# Altium PCB FOC_ESC V1.1.1_with_component_silkscreen.PcbDoc
Units mil, origin at the board's own origin, x right, y up, seen from the top; angles counter-clockwise.
Board outline 1771.65 x 787.4 mil, 4 copper layers (Top Layer, Mid-Layer 2, Mid-Layer 3, Bottom Layer); 83 components, 57 nets, 248 pads, 542 vias.
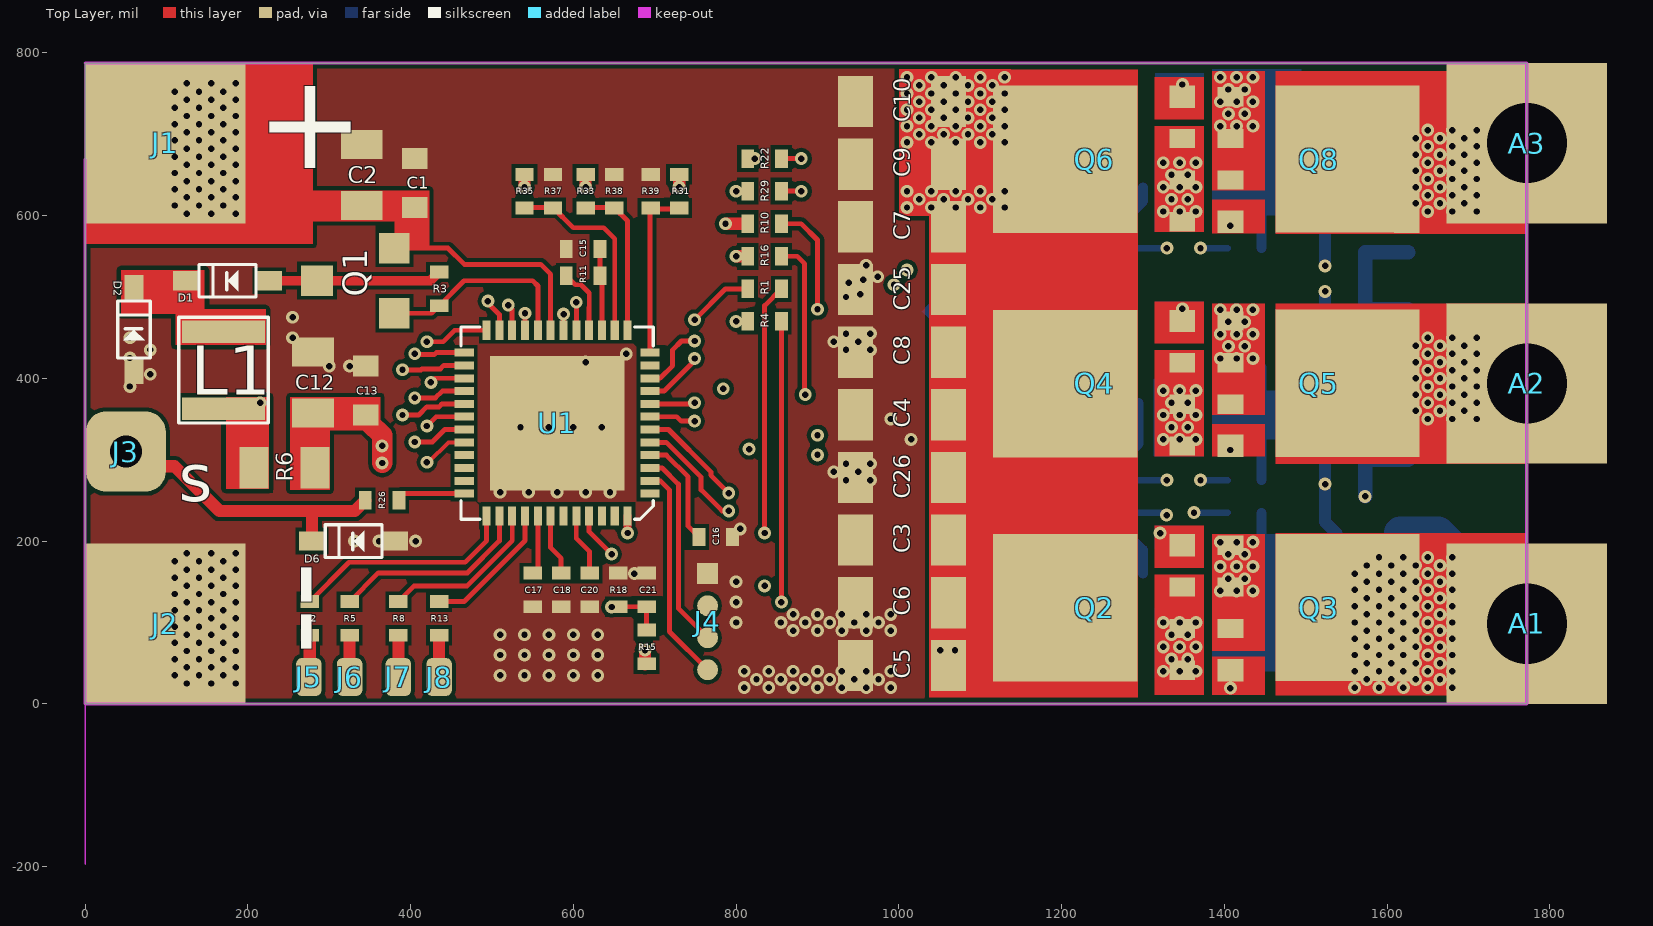
[diagram p0: Top Layer view]
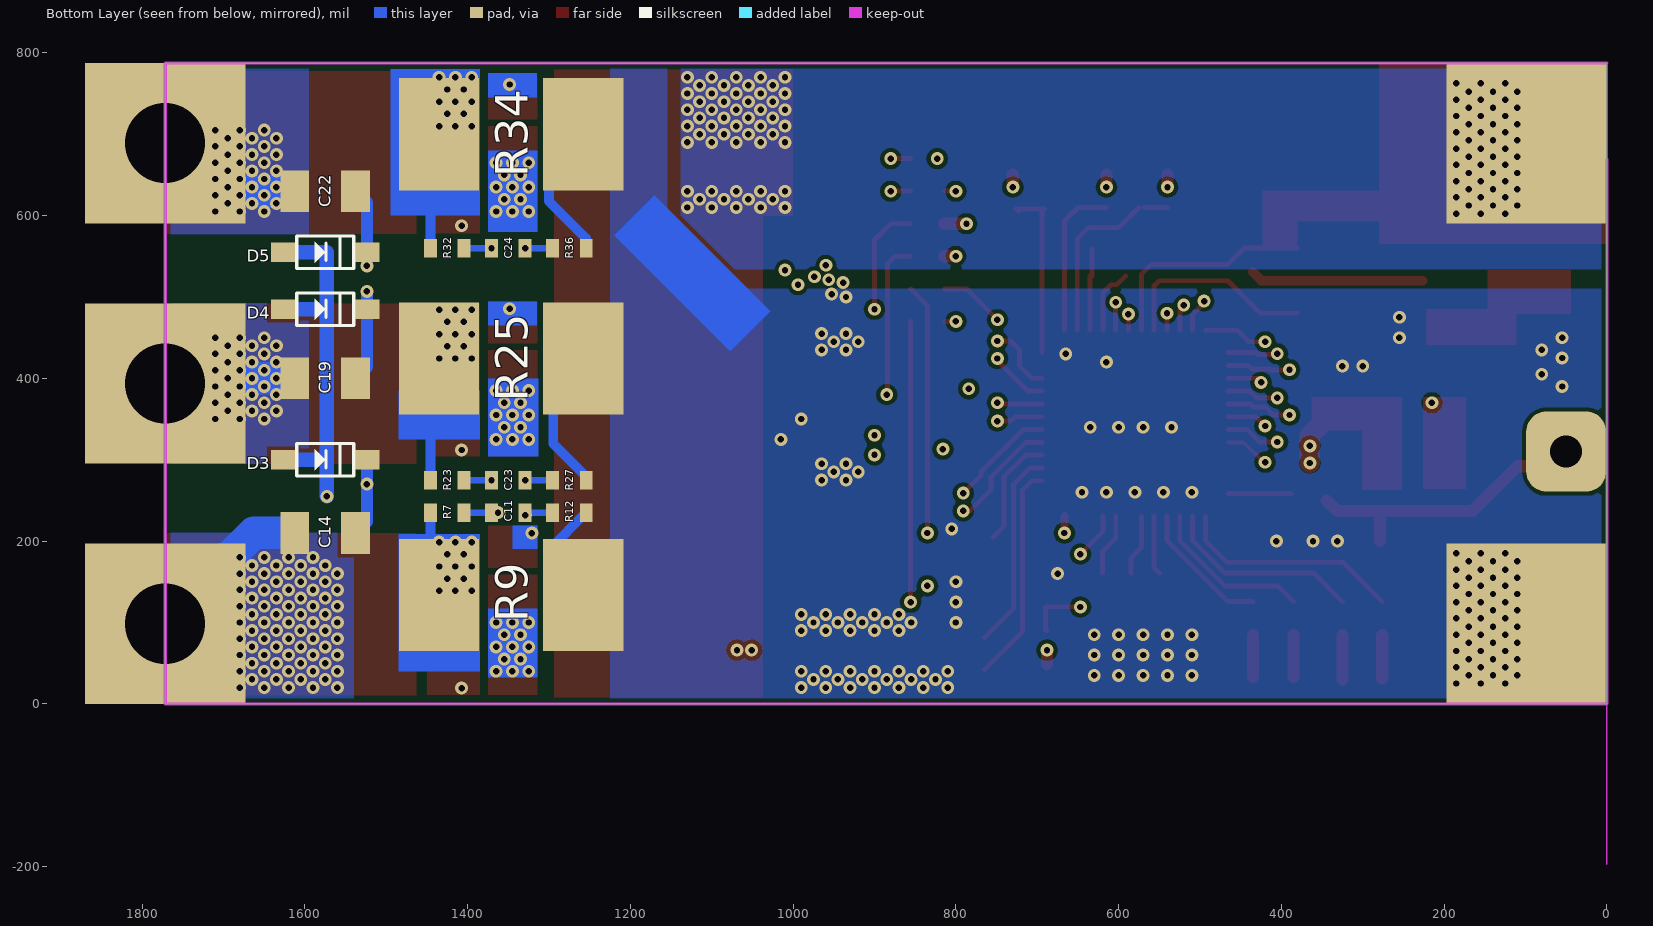
[diagram p1: Bottom Layer view, seen from below]
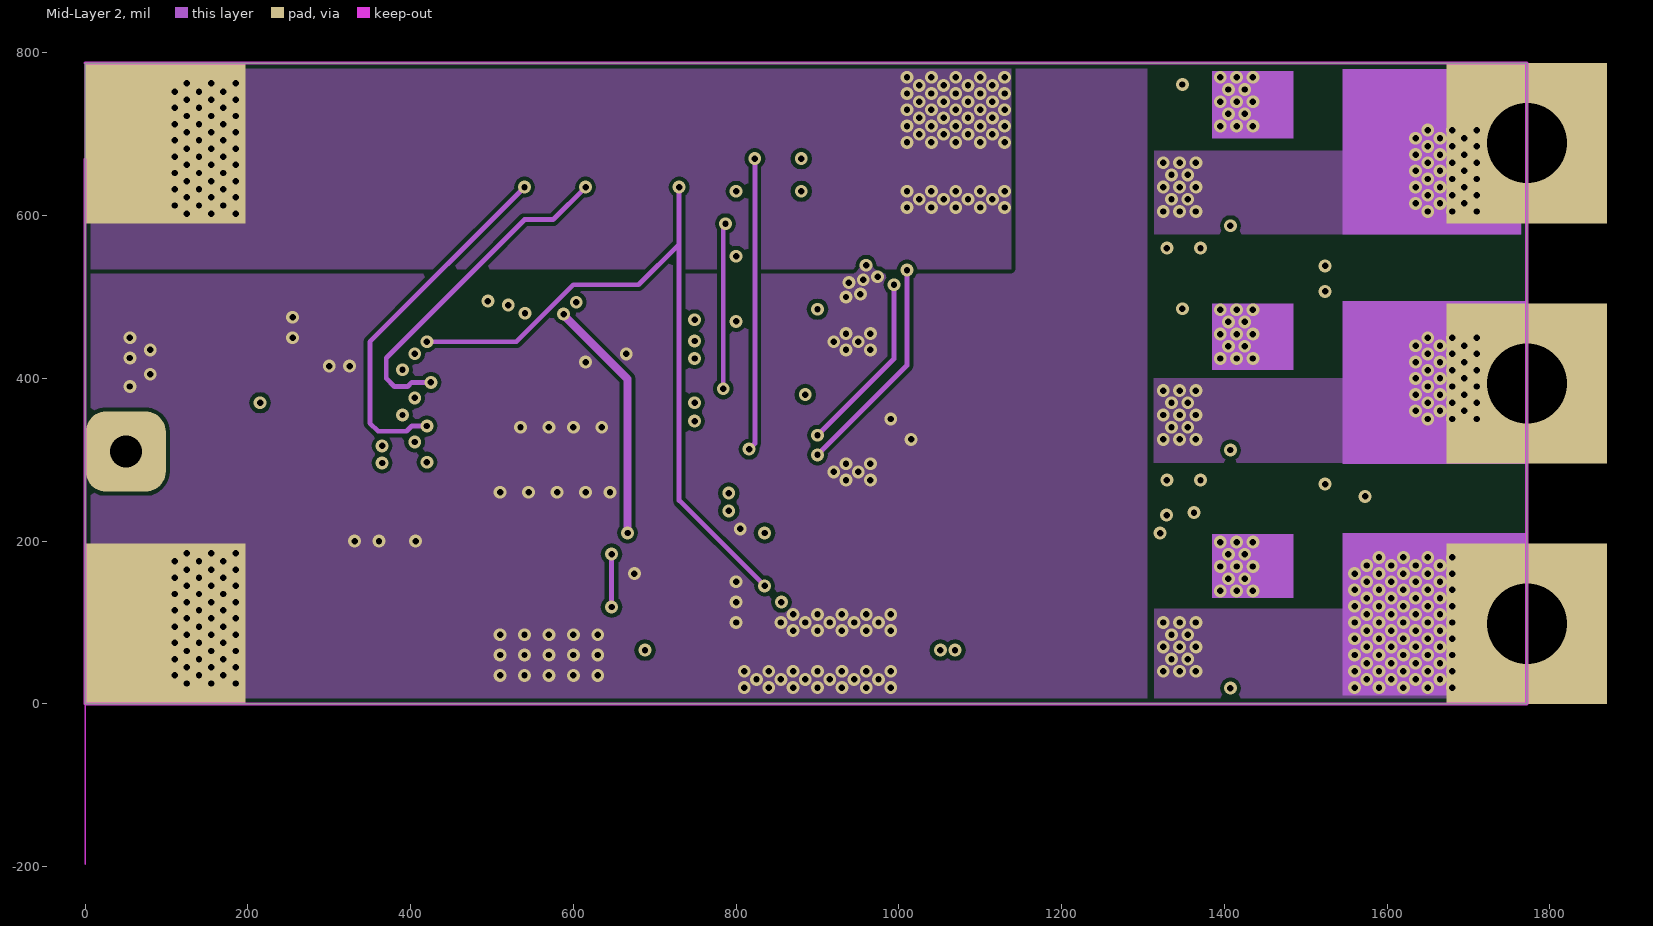
[diagram p2: Mid-Layer 2]
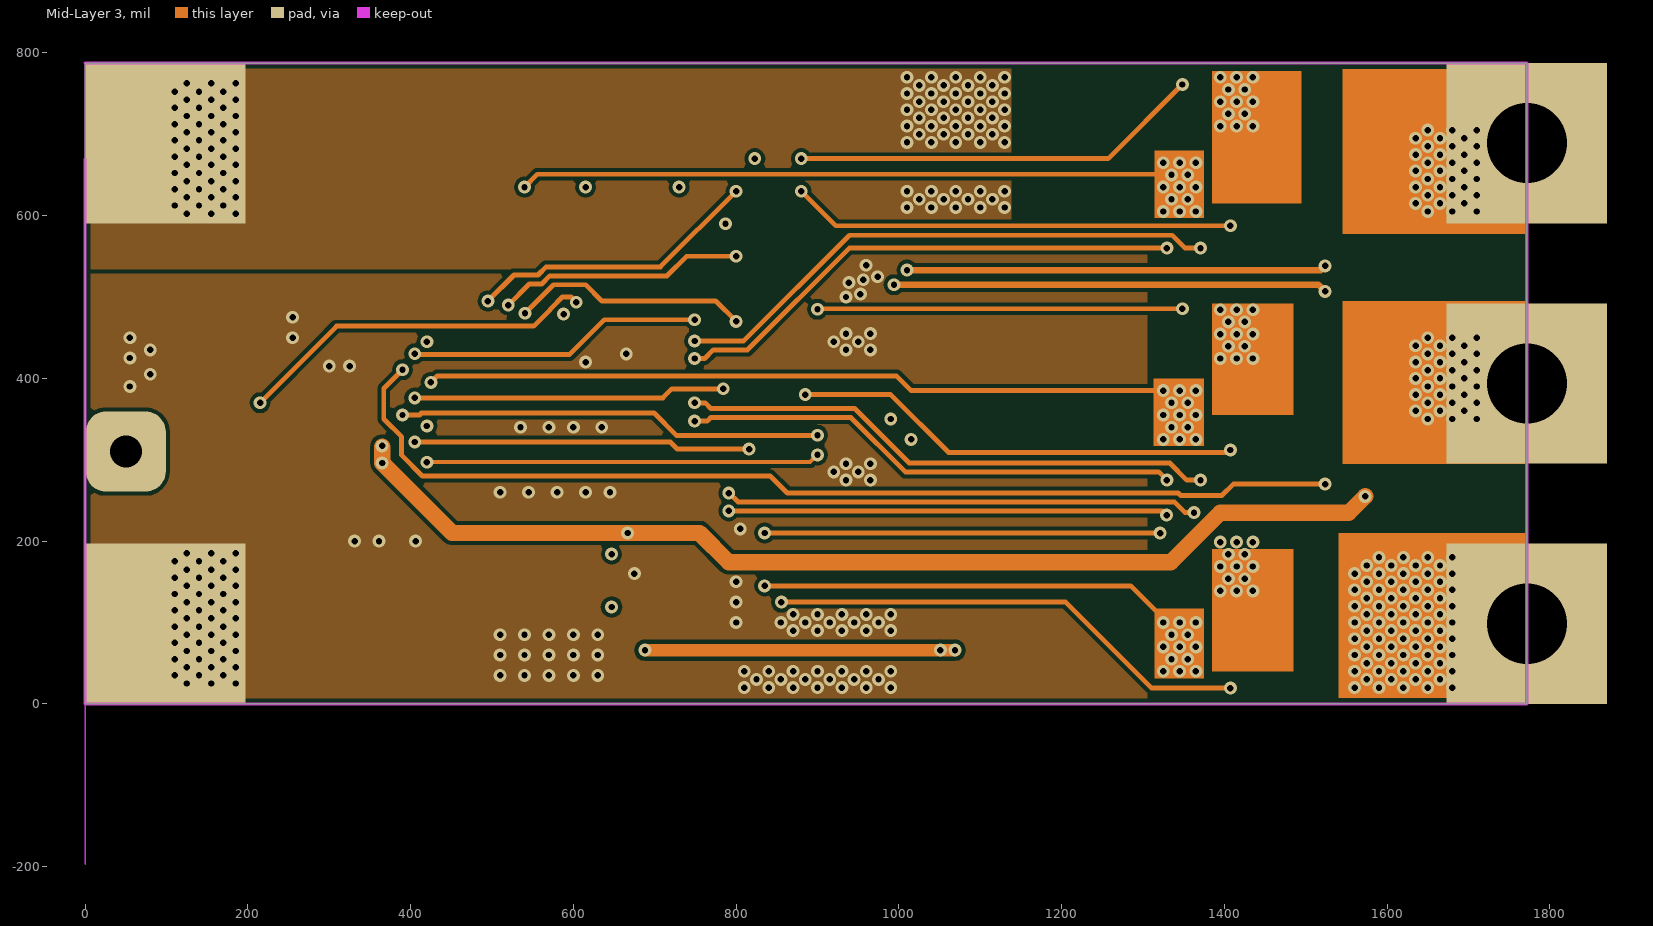
[diagram p3: Mid-Layer 3]

## Layer stack, top to bottom
Top Solder: solder mask 0.4, Solder Resist, Dk 3.5
Top Layer: signal copper 1.4
Dielectric1: core 12.6, FR-4, Dk 4.8
Mid-Layer 2: signal copper 1.4
Dielectric2: prepreg 12.6, FR-4, Dk 4.8
Mid-Layer 3: signal copper 1.4
Dielectric3: core 12.6, FR-4, Dk 4.8
Bottom Layer: signal copper 1.4
Bottom Solder: solder mask 0.4, Solder Resist, Dk 3.5

## Board outline
0,0 1771.65,0 1771.65,787.4 0,787.4

## Design rules (kind name [scope] priority, off if disabled: settings)
Clearance [All] p1: gap=5 ignorepadtopadclearanceinfootprint=FALSE except(0: Arc-Hole Track-Hole SMDPad-Hole THPad-Hole Via-Hole Fill-Hole Poly-Hole Region-Hole Text-Hole)
PlaneConnect [All] p1: planeconnectstyle=Direct reliefexpansion=20 reliefentries=4 reliefconductorwidth=10 reliefairgap=10
PolygonConnect [All] p1: connectstyle=Direct reliefconductorwidth=10 reliefentries=4 polygonreliefangle="90 Angle" airgapwidth=10
RoutingVias [All] p1: holewidth=28 width=50 viastyle="Through Hole" minholewidth=28 minwidth=50 maxholewidth=28 maxwidth=50
SilkToSolderMaskClearance SilkscreenOverComponentPads [IsPad] p1: minsilkscreentomaskgap=10 clearancetoexposedcopper=TRUE
SolderMaskExpansion [All] p1: expansion=0
Width [All] p1: maxlimit=50 minlimit=5 preferedwidth=8
28 further rules are at their usual default settings.

## Components (designator, comment, footprint, x,y, rotation, side; value= is the part's Value field where it differs from the comment)
A1 "" "PAD-1  4*3"#1 1771.65,98.43 r90 top
A2 "" "PAD-1  4*3"#1 1771.65,393.7 r90 top
A3 "" "PAD-1  4*3"#1 1771.65,688.98 r90 top
C1 "0.1uF/25V" 0603-RES 405,640 r90 top
C2 "2.2uF/50V" 0805-RES 340,650 r90 top
C3 "22uF/35V" 1206-RES 1003.94,201.22 r90 top
C4 "22uF/35V" 1206-RES 1003.94,355.21 r90 top
C5 "22uF/35V" 1206-RES 1003.94,47.24 r90 top
C6 "22uF/35V" 1206-RES 1003.94,124.23 r90 top
C7 "22uF/35V" 1206-RES 1003.94,586.18 r90 top
C8 "22uF/35V" 1206-RES 1003.94,432.2 r90 top
C9 "22uF/35V" 1206-RES 1003.94,663.17 r90 top
C10 "22uF/35V" 1206-RES 1003.94,740.16 r90 top
C11 "332" 0402-RES 1350,235 r180 bottom
C12 "10uF/25V" 0805-RES 280,395 r90 top
C13 "0.1uF/25V" 0603-RES 345,385 r90 top
C14 "1uF/25V" 0805-RES 1575,210 r0 bottom
C15 "4.7uF/6.3V" 0402-RES 612,559 r0 top
C16 "2.2uF/6.3V" 0402-RES 775,205 r180 top
C17 "2.2uF/6.3V" 0402-RES 550,140 r90 top
C18 "2.2uF/6.3V" 0402-RES 585,140 r90 top
C19 "1uF/25V" 0805-RES 1575,400 r0 bottom
C20 "4.7uF/6.3V" 0402-RES 620,140 r90 top
C21 "0.1uF/25V" 0402-RES 690,140 r90 top
C22 "1uF/25V" 0805-RES 1575,630 r0 bottom
C23 "332" 0402-RES 1350,275 r180 bottom
C24 "332" 0402-RES 1350,560 r180 bottom
C25 "22uF/35V" 1206-RES 1003.94,509.19 r90 top
C26 "22uF/35V" 1206-RES 1003.94,278.21 r90 top
D1 "T4" SOD323 175,520 r0 top
D2 "T4" SOD323 60,460 r270 top
D3 "T4" SOD323 1575,300 r0 bottom
D4 "T4" SOD323 1575,485 r0 bottom
D5 "T4" SOD323 1575,555 r0 bottom
D6 "3V3 TVS" SOD323 330,200 r0 top
J1 "BAT" "PAD-1  4*3"#2 98.43,688.98 r90 top
J2 "GND" "PAD-1  4*3"#2 98.43,98.43 r90 top
J3 "RC_IN" "PAD-1  2*1.5" 50,310 r180 top
J4 "SWD" 1.0-4p 765,160 r0 top
J5 "PAD" "PAD-1  0.8*1.2" 275,33 r270 top
J6 "PAD" "PAD-1  0.8*1.2" 325,33 r270 top
J7 "PAD" "PAD-1  0.8*1.2" 385,33 r90 top
J8 "PAD" "PAD-1  0.8*1.2" 435,33 r90 top
L1 "LCF1008-150K-T" LCF1008-RES 170,410 r90 top
Q1 "SI2308" SOT-23 380,480 r90 top
Q2 "NTMFS5C430NL" DFN5*6 1240.16,118.11 r90 top
Q3 "NTMFS5C430NL" DFN5*6 1515.75,118.11 r270 top
Q4 "NTMFS5C430NL" DFN5*6 1240.16,393.7 r90 top
Q5 "NTMFS5C430NL" DFN5*6 1515.75,393.7 r270 top
Q6 "NTMFS5C430NL" DFN5*6 1240.16,669.29 r90 top
Q8 "NTMFS5C430NL" DFN5*6 1515.75,669.29 r270 top
R1 "10R" 0402-RES 835,510 r0 top
R2 "100R" 0402-RES 276,105 r270 top
R3 "1K" 0402-RES 435,510 r90 top
R4 "10R" 0402-RES 835,470 r0 top
R5 "100R" 0402-RES 325,105 r270 top
R6 "0.33R" 0805-RES 245,290 r180 top
R7 "100R 1%" 0402-RES 1425,235 r0 bottom
R8 "100R" 0402-RES 385,105 r270 top
R9 "0.001R" 2512-RES 1346.46,133.7 r180 bottom
R10 "10R" 0402-RES 835,590 r0 top
R11 "51R" 0402-RES 612,526 r180 top
R12 "100R 1%" 0402-RES 1275,235 r180 bottom
R13 "100R" 0402-RES 435,105 r270 top
R15 "47K" 0402-RES 690,70 r270 top
R16 "10R" 0402-RES 835,550 r0 top
R18 "2K" 0402-RES 655,140 r270 top
R22 "10R" 0402-RES 835,670 r0 top
R23 "100R 1%" 0402-RES 1425,275 r0 bottom
R25 "0.001R" 2512-RES 1346.46,424.29 r180 bottom
R26 "1K" 0402-RES 365,250 r180 top
R27 "100R 1%" 0402-RES 1275,275 r180 bottom
R29 "10R" 0402-RES 835,630 r0 top
R31 "47K" 0402-RES 730,630 r90 top
R32 "100R 1%" 0402-RES 1425,560 r0 bottom
R33 "47K" 0402-RES 615,630 r90 top
R34 "0.001R" 2512-RES 1346.46,700 r180 bottom
R35 "47K" 0402-RES 540,630 r90 top
R36 "100R 1%" 0402-RES 1275,560 r180 bottom
R37 "2K" 0402-RES 575,630 r270 top
R38 "2K" 0402-RES 650,630 r270 top
R39 "2K" 0402-RES 695,630 r270 top
U1 "PCA5523" QFN48 580,345 r180 top

## Footprints (in the part's own frame and the unit in brackets; to place one, negate y for a bottom-side part, rotate by r counter-clockwise, add the part's x,y. Pads: shape width x height; smd on the part's side, far side on the other; paste and mask are expansions set on the pad)
1.0-4p [mm]
  rect 0.65x0.65 smd: 1(0,0)
  round 0.65 smd: 2(0,-1) 3(0,-2) 4(0,-3)
0402-RES [mm]
  rect 0.4x0.575 smd: 1(-0.525,0) 2(0.525,0)
0603-RES [mm]
  rect 0.65x0.8 smd: 1(-0.762,0) 2(0.762,0)
0805-RES [mm]
  rect 0.9x1.3 smd: 1(-0.95,0) 2(0.95,0)
1206-RES [mm]
  rect 1.6x1.1 smd: 1(0,-1.45) 2(0,1.45)
2512-RES [mm]
  rect 2.5x3.5 smd mask+0: 1(-2.25,0) 2(2.25,0)
DFN5*6 [mm]
  rect 0.6x0.8 smd: 3(-1.95,-2.75) 3(-0.65,-2.75) 3(0.65,-2.75)
  rect 0.7x0.8 smd: 4(1.95,-2.75) 5(-1.95,2.75) 5(-0.65,2.75) 5(0.65,2.75) 5(1.95,2.75)
  rect 4.6x4.5 smd mask+0: 5(-0.006,0.908)
LCF1008-RES [mm]
  rect 0.7x2.6 smd: 1(-1.2,0) 2(1.2,0)
  silkscreen extent -1.65,-1.4 1.65,1.4
"PAD-1  0.8*1.2" [mm]
  rrect50% 1.2x0.8 smd: 1(0,0)
"PAD-1  2*1.5" [mm]
  rrect50% 2.5x2.5 hole 1: 1(0,0)
"PAD-1  4*3"#1 [mm]
  rect 5x5 hole 2.5: 1(0,0)
"PAD-1  4*3"#2 [mm]
  rect 5x5 all layers, no hole: 1(0,0)
QFN48 [mm]
  rect 4.2x4.2 smd: 0(0,0)
  rect 0.6x0.25 smd: 1(-2.9,2.2) 2(-2.9,1.8) 3(-2.9,1.4) 4(-2.9,1) 5(-2.9,0.6) 6(-2.9,0.2) 7(-2.9,-0.2) 8(-2.9,-0.6) 9(-2.9,-1) 10(-2.9,-1.4) 11(-2.9,-1.8) 12(-2.9,-2.2) 25(2.9,-2.2) 26(2.9,-1.8) 27(2.9,-1.4) 28(2.9,-1) 29(2.9,-0.6) 30(2.9,-0.2) 31(2.9,0.2) 32(2.9,0.6) 33(2.9,1) 34(2.9,1.4) 35(2.9,1.8) 36(2.9,2.2)
  rect 0.25x0.6 smd: 13(-2.2,-2.9) 14(-1.8,-2.9) 15(-1.4,-2.9) 16(-1,-2.9) 17(-0.6,-2.9) 18(-2.2,2.9) 18(-0.2,-2.9) 19(0.2,-2.9) 20(0.6,-2.9) 21(1,-2.9) 22(1.4,-2.9) 23(1.8,-2.9) 24(2.2,-2.9) 37(2.2,2.9) 38(1.8,2.9) 39(1.4,2.9) 40(1,2.9) 41(0.6,2.9) 42(0.2,2.9) 43(-0.2,2.9) 44(-0.6,2.9) 45(-1,2.9) 46(-1.4,2.9) 47(-1.8,2.9)
  silkscreen extent -3,-3 3,3
SOD323 [mm]
  rect 0.8x0.6 smd paste+0 mask+0: 1(1.3,0) 2(-1.3,0)
  silkscreen extent -0.89,-0.51 0.89,0.51
SOT-23 [mm]
  rect 0.95x0.95 smd: 1(0,0) 2(2.032,0)
  rect 0.95x1 smd: 3(1.016,2.413)

## Part data
A1 A2 A3 J1 J2 J3: library part PAD
C1 C2 C11 C12 C13 C14 C15 C16 C17 C18 C19 C20 C21 C22 C23 C24: library part Cap
C3 C4 C5 C6 C7 C8 C9 C10 C25 C26: library part C
D1 D2 D3 D4 D5 D6: library part Diode
J4: library part J_4P
L1 R1 R2 R3 R4 R5 R6 R7 R8 R9 R10 R11 R12 R13 R15 R16 R18 R22 R23 R25 R26 R27 R29 R31 R32 R33 R34 R35 R36 R37 R38 R39: library part R
Q1: library part P-MOS
Q2 Q3 Q4 Q5 Q6 Q8: library part AON7418

## Via types
v1: diameter 15.75, hole 7.87, Top Layer to Bottom Layer, tented both sides, 542 vias

## Nets (pads, with @x,y where several pads share a name; then routed paths per layer and width w, separated by ;. In a path a pad name is that pad's centre, name@x,y a point inside that pad or via, vN(x,y) a via of type N, cw(c..) or ccw(c..) an arc to the next point about the centre after c; other vN are vias at no path point)
+3V3: J4.2
A_DRV_HI: R1.1 U1.25 | length 516.5
  Top Layer w6: v1(405,430.25) 406.12,429.13 429.13,429.13 431.61,431.61 U1.25 ; v1(749,472) 787,510 R1.1 805,510
  Mid-Layer 3 w6: v1(405,430.25) 406.12,429.13 595.05,429.13 637.92,472 v1(749,472)
  Bottom Layer w6: v1(405,430.25) v1@406.12,429.13
A_DRV_LO: R4.1 U1.21 | length 327.7
  Top Layer w6: U1.21 v1(540.63,480) ; v1(800,470) R4.1
  Mid-Layer 3 w6: v1(540.63,480) 575.63,515 615.12,515 635.12,495 775,495 v1(800,470)
B_DRV_HI: R10.1 U1.28 | length 679.4
  Top Layer w6: v1(405,376) 430.44,376 438.81,384.37 U1.28
  Top Layer w15: v1(787,590) R10.1
  Mid-Layer 2 w6: v1(784.13,387.13) 784.13,587.13 v1(787,590)
  Mid-Layer 3 w6: v1(405,376) 710,376 721,387 v1@784.13,387
B_DRV_LO: R16.1 U1.22 | length 345.3
  Top Layer w6: v1@524.76,485.24 524.76,459.3 U1.22
  Top Layer w15: v1(800,550) R16.1
  Mid-Layer 3 w6: v1(520,490) 546,516 561.07,516 571.07,526 715.13,526 739.13,550 v1(800,550)
BAT_IN: C21.1 R15.1 R18.2 U1.45 | length 186.9
  Top Layer w6: U1.45 619.37,211.63 v1(647,184) ; R18.2 C21.1 R15.1
  Mid-Layer 2 w6: v1(647,119) v1(647,184)
C_DRV_HI: R22.1 U1.31 | length 841.7
  Top Layer w6: v1(405,321.75) 426.75,321.75 442.13,337.13 U1.31
  Mid-Layer 2 w6: v1(816,313) 823,320 v1(823,670)
  Mid-Layer 3 w6: v1(405,321.75) 719.25,321.75 728,313 v1(816,313)
C_DRV_LO: R29.1 U1.23 | length 414.5
  Top Layer w6: v1@495,492.55 509.13,478.42 U1.23 ; v1(800,630) R29.1
  Mid-Layer 3 w6: v1(495,495) 527,527 556.52,527 566.52,537 707,537 v1(800,630)
GND: C1.2 C2.2 C3.2 C4.2 C5.2 C6.2 C7.2 C8.2 C9.2 C10.2 C12.2 C13.2 C15.1 C16.1 C17.1 C18.1 C20.1 C21.2 C25.2 C26.2 D2.1 D6.1 J2.1 J4.1 R9.2 R12.2 R18.1 R25.2 R27.2 R34.2 R36.2 R37.1 R38.1 R39.1 U1.0 | length 314.7
  Bottom Layer w11.81: R9.2@1254.33,137.24 R9.2 ; R12.2 1300,189.33 R9.2@1300,160 ; R27.2 1254.33,279.33 1295,320 R25.2@1295,370 ; R25.2@1254.33,420.75 R25.2 ; R36.2 1254.33,571.85 1300,617.52 R34.2@1300,635 ; R34.2@1254.33,696.46 R34.2
  other v1: 810,20 840,20 870,20 900,20 930,20 960,20 990,20 125,25 155,25 185,25 825,30 855,30 885,30 915,30 945,30 975,30 110,35 140,35 170,35 510,35 540,35 570,35 600,35 630,35 810,40 840,40 870,40 900,40 930,40 960,40 990,40 125,45 155,45 185,45 110,55 140,55 170,55 510,60 540,60 570,60 600,60 630,60 125,65 155,65 185,65 110,75 140,75 170,75 125,85 155,85 185,85 510,85 540,85 570,85 600,85 630,85 870,90 900,90 930,90 960,90 990,90 110,95 140,95 170,95 800,100 855,100 885,100 915,100 945,100 975,100 125,105 155,105 185,105 870,110 900,110 930,110 960,110 990,110 110,115 140,115 170,115 125,125 155,125 185,125 800,125 110,135 140,135 170,135 125,145 155,145 185,145 800,150 110,155 140,155 170,155 675,160 125,165 155,165 185,165 110,175 140,175 170,175 125,185 155,185 185,185 331.18,200 361.18,200 406.18,200 805,215 510,260 545,260 580,260 615,260 645,260 935,275 965,275 920,285 950,285 935,295 965,295 1015,325 535,340 570,340 600,340 635,340 990,350 55,390 80,405 300,415 325,415 615,420 55,425 665,430 80,435 935,435 965,435 920,445 950,445 55,450 255,450 935,455 965,455 255,475 935,500 952.68,503.54 938.54,517.68 956.21,521.21 973.89,524.75 959.75,538.89
IA_A: C11.1 R7.1 U1.6 | length 744.9
  Top Layer w6: U1.6 715,337.13 ; 716.87,337.13 769,285 769,281 v1(791,259)
  Mid-Layer 3 w6: v1(791,259) 791.45,259 802.32,248.13 1338.65,248.13 1351.78,235 v1(1362.67,235)
  Bottom Layer w8: C11.1 R7.1
IA_B: C11.2 R12.1 U1.5 | length 717.8
  Top Layer w6: U1.5 714.18,321.38 757,278.56 757,263 782.87,237.13 v1(790.87,237.13)
  Mid-Layer 3 w6: v1(790.87,237.13) 1323.87,237.13 v1(1329,232)
  Bottom Layer w8: R12.1 C11.2 1329,234.67 v1(1329,232)
IB_A: C23.1 R23.1 U1.8 | length 750
  Top Layer w6: U1.8 747.68,368.62 v1(749,369.94)
  Mid-Layer 3 w6: v1(749,369.94) 762.06,369.94 769.06,362.94 945.62,362.94 1012.56,296 1333,296 1354,275 v1(1370.67,275)
  Bottom Layer w8: v1(1370.67,275) R23.1
IB_B: C23.2 R27.1 U1.7 | length 704.8
  Top Layer w6: U1.7 727.13,352.87 732.54,347.46 v1(749,347.46)
  Mid-Layer 3 w6: v1(749,347.46) 764.52,347.46 769,351.94 941.06,351.94 1008,285 1319.33,285 v1(1329.33,275)
  Bottom Layer w8: R27.1 v1(1329.33,275)
IC_A: C24.1 R32.1 U1.10 | length 800.9
  Top Layer w6: U1.10 706.47,400.12 722,415.65 722,435 732.9,445.9 v1(749,445.9)
  Mid-Layer 3 w6: v1(749,445.9) 749.1,446 809.44,446 939.32,575.87 1335.91,575.87 1351.78,560 v1(1370.67,560)
  Bottom Layer w8: v1(1370.67,560) R32.1
IC_B: C24.2 R36.1 U1.9 | length 743
  Top Layer w6: U1.9 711.37,384.37 749,422 v1(749,424.42)
  Mid-Layer 3 w6: v1(749,424.42) 761.42,424.42 772,435 814,435 939,560 v1(1329.33,560)
  Bottom Layer w8: R36.1 v1(1329.33,560)
NetC14_1: C14.1 D3.2 U1.26 | length 1459
  Top Layer w6: v1(390,410.5) 412.7,410.5 413.82,411.62 436.62,411.62 440.87,415.87 U1.26
  Mid-Layer 3 w6: v1@390.37,410.87 v1(390,410.5) 367,387.5 367,350 389,328 389,305.55 414.55,280 842,280 862.87,259.13 1343.21,259.13 1346.34,256 1397,256 1411,270 v1(1523.82,270)
  Bottom Layer w15: D3.2 v1(1523.82,270) 1523.82,223.78 C14.1
NetC15_2: C15.2 R11.1 U1.15 | length 99.8
  Top Layer w6: R11.1 C15.2 ; U1.15 R11.1@635.12,526
NetC16_2: C16.2 U1.4 | length 137.4
  Top Layer w6: U1.4 714.37,305.63 741,279 741,233.67 741,218.33 C16.2
NetC17_2: C17.2 U1.41 | length 127.2
  Top Layer w6: C17.2 556.38,167.05 U1.41 556.38,176.38
NetC18_2: C18.2 U1.42 | length 75.5
  Top Layer w6: U1.42 572.13,191.87 585,179 C18.2
NetC19_1: C19.1 D4.2 U1.29 | length 1473.5
  Top Layer w6: v1(390,355) 410,355 420,365 435,365 438.62,368.62 U1.29
  Mid-Layer 2 w6: v1(900,330) 994,424 v1(994,515)
  Mid-Layer 3 w6: v1(390,355) 411.05,355 413.42,357.37 699.18,357.37 726.56,330 v1(900,330)
  Mid-Layer 3 w8: v1(994,515) 1515.64,515 v1(1523.82,506.82)
  Bottom Layer w15: v1(1523.82,506.82) D4.2 1523.82,413.78 C19.1
NetC20_2: C20.2 U1.44 | length 76.9
  Top Layer w6: U1.44 603.62,203.38 620,187 C20.2
NetC22_1: C22.1 D5.2 U1.32 | length 1418.4
  Top Layer w5: v1(420,297) 422,297 446.38,321.38 U1.32
  Mid-Layer 2 w6: v1(900,306) 1010,416 v1(1010,533)
  Mid-Layer 3 w5: v1(420,297) 891,297 v1(900,306)
  Mid-Layer 3 w8: v1(1010,533) v1@1518.64,533
  Bottom Layer w15: v1(1523.82,538.18) D5.2 1523.82,616.22 C22.1
NetD1_1: D1.1 Q1.3 R3.2 | length 213.2
  Top Layer w12: D1.1 Q1.3 424.33,520 R3.2
NetD1_2: D1.2 D2.2 L1.2
NetD6_2: D6.2 J3.1 R26.2 | length 367.4
  Top Layer w6: J3.1 J3.1@68,292
  Top Layer w15: J3.1@68,292 110,292 165,237 277.64,237 ; D6.2 278.82,235.82 277.64,237 ; R26.2 331.33,237 277.64,237
NetJ5_1: J5.1 R2.2 | length 53.3
  Top Layer w15: J5.1@276,31 R2.2
NetJ6_1: J6.1 R5.2 | length 54.3
  Top Layer w15: J6.1@325,30 R5.2
NetJ7_1: J7.1 R8.2 | length 51.3
  Top Layer w15: J7.1 R8.2
NetJ8_1: J8.1 R13.2 | length 51.3
  Top Layer w15: J8.1 R13.2
NetL1_1: L1.1 R6.2 U1.17 | length 494.2
  Top Layer w6: U1.17 603.87,459.43 603.87,493.37 v1(603.62,493.62)
  Mid-Layer 3 w6: v1(215,370) 290,445 ; 300,455 290,445 ; v1(603.62,493.62) 597.24,500 586.55,500 572.13,485.58 572.13,485 551.25,464.13 309.13,464.13 290,445
NetQ1_1: Q1.1 R3.1 U1.20 | length 250.1
  Top Layer w6: Q1.1 425.67,480 R3.1 465.67,520 550,520 556.5,513.5 556.5,459.3 U1.20
NetQ2_4: Q2.4 R1.2 | length 829.7
  Top Layer w6: v1(835,210) 835,489.33 R1.2
  Mid-Layer 3 w6: v1(835,210) 835.12,209.88 925,209.88 ; 889.88,209.88 925,209.88 ; v1(1321,209.88) 925,209.88
NetQ3_3: Q3.3 R7.2 R9.1 | length 105.7
  Bottom Layer w11.81: R9.1 1445.67,144.33 R7.2
  other v1: 1395,138.82 1415,138.82 1435,138.82 1405,153.82 1425,153.82 1395,168.82 1415,168.82 1435,168.82 1405,183.82 1425,183.82 1395,198.82 1415,198.82 1435,198.82
NetQ3_4: Q3.4 R4.2 | length 940.6
  Top Layer w6: v1(855.67,125) R4.2
  Mid-Layer 3 w6: v1(855.67,125) 1205,125 1310.66,19.34 v1(1407.48,19.34)
NetQ4_4: Q4.4 R10.2 | length 586.2
  Top Layer w6: R10.2 880,590 900,570 v1(900,485)
  Mid-Layer 3 w6: v1(900,485) 900.47,485.47 1083,485.47 v1(1348.43,485.47)
NetQ5_3: Q5.3 R23.2 R25.1 | length 153.7
  Bottom Layer w11.81: R25.1 1445.67,413.66 R23.2
  other v1: 1395,424.41 1415,424.41 1435,424.41 1405,439.41 1425,439.41 1395,454.41 1415,454.41 1435,454.41 1405,469.41 1425,469.41 1395,484.41 1415,484.41 1435,484.41
NetQ5_4: Q5.4 R16.2 | length 746.6
  Top Layer w6: R16.2 875,550 884.13,540.87 884.13,380.87 v1(885,380)
  Mid-Layer 3 w6: v1(885,380) 990,380 1061.05,308.95 1404.5,308.95 v1(1407.48,311.93)
NetQ6_4: Q6.4 R22.2 | length 530.5
  Top Layer w6: R22.2 v1(880,670)
  Mid-Layer 3 w6: v1(880,670) 1257.36,670 v1(1348.43,761.06)
NetQ8_3: Q8.3 R32.2 R34.1 | length 144.4
  Bottom Layer w11.81: R34.1 1445.67,689.37 R32.2
  other v1: 1395,710 1415,710 1435,710 1405,725 1425,725 1395,740 1415,740 1435,740 1405,755 1425,755 1395,770 1415,770 1435,770
NetQ8_4: Q8.4 R29.2 | length 569.4
  Top Layer w6: R29.2 v1(880,630)
  Mid-Layer 3 w6: v1(880,630) 922.48,587.52 v1(1407.48,587.52)
NetR11_2: R11.2 U1.16 | length 82.7
  Top Layer w6: R11.2 602.33,515 609.37,515 619.5,504.87 619.5,487.05 619.37,486.92 U1.16
NetR26_1: R26.1 U1.36 | length 78.5
  Top Layer w6: R26.1@387.28,258.39 U1.36
NetR31_1: R31.1 R39.2 U1.12 | length 217.5
  Top Layer w6: U1.12 694.17,605.16 691,608.33 726,608.33 R31.1@722.83,605.16
NetR33_1: R33.1 R38.2 U1.13 | length 192.7
  Top Layer w6: R33.1@615,610 650,610 666.61,593.39 U1.13
NetR35_1: R35.1 R37.2 U1.14 | length 232
  Top Layer w6: R35.1@540,610 R37.2@568,610 ; R37.2@575,610 600,585 637.18,585 650.87,571.31 650.87,527.13 U1.14
OUTA: A1.1 C14.2 Q2.3 Q3.5 R31.2 U1.24 | length 1632.7
  Top Layer w6: v1(420,445) 440,445 454.17,459.17 U1.24
  Top Layer w15: v1(730,635) R31.2
  Mid-Layer 2 w6: v1(420,445) 530,445 600,515 680,515 730,565 ; v1(730,635) 730,565 ; v1(835,145) 730,250 730,565
  Mid-Layer 3 w6: v1(835,145) 1285,145 1320,110
  Bottom Layer w18: C14.2 1660,210
  Bottom Layer w40: C14.2@1616.4,210 1663,210 A1.1@1699,174
  other v1: 1560,20 1590,20 1620,20 1650,20 1680,20 1575,30 1605,30 1635,30 1665,30 1325,40 1345,40 1365,40 1560,40 1590,40 1620,40 1650,40 1680,40 1575,50 1605,50 1635,50 1665,50 1335,55 1355,55 1560,60 1590,60 1620,60 1650,60 1680,60 1325,70 1345,70 1365,70 1575,70 1605,70 1635,70 1665,70 1560,80 1590,80 1620,80 1650,80 1680,80 1335,85 1355,85 1575,90 1605,90 1635,90 1665,90 1325,100 1345,100 1365,100 1560,100 1590,100 1620,100 1650,100 1680,100 1575,110 1605,110 1635,110 1665,110 1560,120 1590,120 1620,120 1650,120 1680,120 1575,130 1605,130 1635,130 1665,130 1560,140 1590,140 1620,140 1650,140 1680,140 1575,150 1605,150 1635,150 1665,150 1560,160 1590,160 1620,160 1650,160 1680,160 1575,170 1605,170 1635,170 1665,170 1590,180 1620,180 1650,180 1680,180
OUTB: A2.1 C19.2 Q4.3 Q5.5 R33.2 U1.27 | length 1459.9
  Top Layer w6: v1@430.12,400.12 U1.27
  Top Layer w15: v1(615,635) R33.2
  Mid-Layer 2 w6: v1(425,395) 401.55,395 396.55,390 380,390 370,400 370,425 540,595 575,595 v1(615,635)
  Mid-Layer 3 w6: v1(425,395) 433,403 997,403 1015,385 v1(1325,385)
  Bottom Layer w40: C19.2@1616.4,400 A2.1@1696,400
  other v1: 1325,325 1345,325 1365,325 1335,340 1355,340 1650,350 1680,350 1710,350 1325,355 1345,355 1365,355 1635,360 1665,360 1695,360 1335,370 1355,370 1650,370 1680,370 1710,370 1635,380 1665,380 1695,380 1345,385 1365,385 1650,390 1680,390 1710,390 1635,400 1665,400 1695,400 1650,410 1680,410 1710,410 1635,420 1665,420 1695,420 1650,430 1680,430 1710,430 1635,440 1665,440 1695,440 1650,450 1680,450 1710,450
OUTC: A3.1 C22.2 Q6.3 Q8.5 R35.2 U1.30 | length 1392.9
  Top Layer w6: v1(420,341.5) 431.37,352.87 U1.30
  Top Layer w15: v1(540,635) R35.2
  Mid-Layer 2 w6: v1(420,341.5) 401.5,341.5 395,335 360,335 350,345 350,445 v1(540,635)
  Mid-Layer 3 w6: v1(540,635) 555.87,650.87 1326.13,650.87 ; 1326.13,650 v1(1335,650)
  Bottom Layer w40: C22.2@1616.4,630 A3.1@1696,630
  other v1: 1325,605 1345,605 1365,605 1650,605 1680,605 1710,605 1635,615 1665,615 1695,615 1335,620 1355,620 1650,625 1680,625 1710,625 1325,635 1345,635 1365,635 1635,635 1665,635 1695,635 1650,645 1680,645 1710,645 1355,650 1635,655 1665,655 1695,655 1325,665 1345,665 1365,665 1650,665 1680,665 1710,665 1635,675 1665,675 1695,675 1650,685 1680,685 1710,685 1635,695 1665,695 1695,695 1650,705 1680,705 1710,705
PE0: R2.1 U1.37 | length 278.8
  Top Layer w6: R2.1 324.33,174 467,174 493.39,200.39 U1.37
PE1: R5.1 U1.38 | length 245.6
  Top Layer w6: R5.1 360.33,161 469.89,161 509.13,200.25 U1.38
PE2: R8.1 U1.39 | length 201.2
  Top Layer w6: R8.1 404.33,145 469.44,145 524.88,200.44 U1.39
PE3: R13.1 U1.40 | length 166.9
  Top Layer w6: R13.1 465.67,125.67 540.63,200.63 U1.40
SWCLK: J4.3 U1.3 | length 246.7
  Top Layer w6: U1.3 709.12,289.88 729,270 729,117.26 J4.3
SWDIO: J4.4 U1.2 | length 269
  Top Layer w6: U1.2 706.87,274.13 718,263 718,88.89 J4.4
VCC_IN: C1.1 C2.1 C3.1 C4.1 C5.1 C6.1 C7.1 C8.1 C9.1 C10.1 C25.1 C26.1 J1.1 Q1.2 Q2.5 Q4.5 Q6.5 R15.2 U1.19 | length 672.5
  Top Layer w6: Q1.2 446,560 466,540 560,540 572.13,527.87 U1.19
  Top Layer w15: R15.2@688,48.66 v1(688,66)
  Mid-Layer 3 w15: v1(688,66) v1(1069,66)
  other v1: 1051,66 125,602.4 155,602.4 185,602.4 1010,610 1040,610 1070,610 1100,610 1130,610 110,612.4 140,612.4 170,612.4 1025,620 1055,620 1085,620 1115,620 125,622.4 155,622.4 185,622.4 1010,630 1040,630 1070,630 1100,630 1130,630 110,632.4 140,632.4 170,632.4 125,642.4 155,642.4 185,642.4 110,652.4 140,652.4 170,652.4 125,662.4 155,662.4 185,662.4 110,672.4 140,672.4 170,672.4 125,682.4 155,682.4 185,682.4 1010,690 1040,690 1070,690 1100,690 1130,690 110,692.4 140,692.4 170,692.4 1025,700 1055,700 1085,700 1115,700 125,702.4 155,702.4 185,702.4 1010,710 1040,710 1070,710 1100,710 1130,710 110,712.4 140,712.4 170,712.4 1025,720 1055,720 1085,720 1115,720 125,722.4 155,722.4 185,722.4 1010,730 1040,730 1070,730 1100,730 1130,730 110,732.4 140,732.4 170,732.4 1025,740 1055,740 1085,740 1115,740 125,742.4 155,742.4 185,742.4 1010,750 1040,750 1070,750 1100,750 1130,750 110,752.4 140,752.4 170,752.4 1025,760 1055,760 1085,760 1115,760 125,762.4 155,762.4 185,762.4 1010,770 1040,770 1070,770 1100,770 1130,770
VP: C12.1 C13.1 D3.1 D4.1 D5.1 R6.1 U1.18 | length 2169.2
  Top Layer w6: U1.18@587.87,459.17 587.87,478.87 v1(588,479)
  Top Layer w10: v1(666.61,210) U1.18@666.61,230.83
  Top Layer w25: C13.1@350,345 365,330 v1(365,296)
  Mid-Layer 2 w10: v1(588,479) 588,478 587.87,477.87 666.61,399.13 v1(666.61,210)
  Mid-Layer 3 w20: v1@365,316 v1(365,296) 451,210 v1(666.61,210) 755,210 791,174 1334.02,174 1395.02,235 1553,235 v1(1573,255)
  Bottom Layer w18: v1(1573,255) 1573,300 ; D3.1 1573,300 ; D4.1 1573,485 ; D5.1 1573,555 1573,485 ; 1573,300 1573,485
  other v1: 365,317
pads on no net: U1.1 U1.11 U1.33 U1.34 U1.35 U1.43 U1.46 U1.47

## Polygon pours and split planes (outlines as drawn)
GND on Mid-Layer 2 "Mid-Layer 2-No Net 1" (solid, remove dead copper, pour order 0): 1140,787.4 1305,787.4 1305,0 1120,0 0,0 0,395 0,787.4 355,787.4
VCC_IN on Mid-Layer 2 "Mid-Layer 2-No Net 1" (solid, remove dead copper, pour order 2): 0,787.4 0,534 7,534 1138,534 1138,787.4
OUTC on Mid-Layer 2 "Mid-Layer 2-No Net 1" (solid, remove dead copper, pour order 4): 1314,680 1314,577 1771.65,577 1771.65,680 1314,680
OUTB on Mid-Layer 2 "Mid-Layer 2-No Net 1" (solid, remove dead copper, pour order 6): 1313,400 1313,296 1771.65,296 1771.65,400 1313,400
OUTA on Mid-Layer 2 "Mid-Layer 2-No Net 1" (solid, remove dead copper, pour order 8): 1314,109 1314,0 1343,0 1771.65,0 1771.65,64 1771.65,117 1314,117
GND on Mid-Layer 3 "Mid-Layer 2-No Net 1" (solid, remove dead copper, pour order 10): 0,510 0,0 260,0 1305,0 1305,787.4 0,787.4 0,595
VCC_IN on Mid-Layer 3 "Mid-Layer 2-No Net 1" (solid, remove dead copper, pour order 12): 0,787.4 0,534 7,534 1138,534 1138,787.4
OUTC on Bottom Layer "Mid-Layer 2-No Net 1" (solid, remove dead copper, pour order 14): 1771.65,787.4 1595,787.4 1595,650 1595,577 1764.55,577
OUTB on Bottom Layer "Mid-Layer 2-No Net 1" (solid, remove dead copper, pour order 16): 1771.65,492 1595,492 1595,345 1595,295 1771.65,295
OUTA on Bottom Layer "Mid-Layer 2-No Net 1" (solid, remove dead copper, pour order 18): 1540,0 1540,210 1771.65,210 1771.65,0
GND on Bottom Layer "Mid-Layer 2-No Net 1" (solid, remove dead copper, pour order 20): 1225,787.4 1225,0 0,0 0,105 0,510 165,510 1155,510 1155,580 1155,787.4
VCC_IN on Bottom Layer "Mid-Layer 2-No Net 1" (solid, remove dead copper, pour order 22): 0,787.4 0,534 7,534 1138,534 1138,787.4
GND on Top Layer "Mid-Layer 2-No Net 1" (solid, remove dead copper, pour order 24): 455,787.4 0,787.4 0,520 0,0 820,0 1305,0 1305,780.3 1305,787.4

## Keep-outs
Keep-Out Layer:
  lines w1.97: 0,-196.85 0,0 ; 0,669.29 0,787.4
  lines w3.94: 0,669.29 0,0 1771.65,0 1771.65,787.4 0,787.4
  text "FR-4 2.0MM 蓝油白字沉金" at 290,-130 h59.06

## Other copper
Top Layer:
  rectangle net VCC_IN: 1000,599.28 1138,780
  rectangle net VCC_IN: 0,565 280,787.4
  rectangle net VCC_IN: 1037,8 1294,779.4
  rectangle net NetQ6_4: 1314,718.18 1375,770.18
  rectangle net NetQ4_4: 1314,442.59 1375,494.59
  rectangle net NetQ2_4: 1314,167 1375,219
  rectangle net OUTC: 1314,579.59 1375,710.18
  rectangle net NetQ8_3: 1385,630.59 1450,778
  rectangle net NetQ8_4: 1385,578 1449.67,620
  rectangle net NetQ5_4: 1385,304 1450,344
  rectangle net OUTB: 1314,304 1375,434.59
  rectangle net NetQ5_3: 1385,355 1450,492
  rectangle net OUTB: 1463,295 1771.65,492
  rectangle net OUTC: 1463,577.4 1771.65,777.4
  rectangle net OUTA: 1463,10 1771.65,210
  rectangle net NetQ3_4: 1385,11 1450,58
  rectangle net NetQ3_3: 1385,65 1450,209
  rectangle net OUTA: 1314,11 1375,159
  rectangle net VCC_IN: 176,593 423,631
  rectangle net VCC_IN: 380,560 423,593
  rectangle net NetD1_2: 44,479 147,533
  rectangle net NetD1_2: 111,441 222,485
  rectangle net NetL1_1: 173,264 226,377
  rectangle net VP: 252,336 363,377
  rectangle net VP: 252,263 301,336
Mid-Layer 2:
  rectangle net NetQ3_3: 1385,130 1485,209
  rectangle net NetQ5_3: 1385,410 1485,492
  rectangle net NetQ8_3: 1385,695 1485,778
  rectangle net OUTA: 1545,10 1771.65,210
  rectangle net OUTB: 1545,295 1771.65,495
  rectangle net OUTC: 1545,577 1764.55,780.3
Mid-Layer 3:
  rectangle net OUTC: 1545,577.4 1771.65,780
  rectangle net OUTB: 1545,295 1771.65,495
  rectangle net OUTA: 1540,7.11 1771.65,210
  rectangle net NetQ3_3: 1385,40 1485,190
  rectangle net NetQ5_3: 1385,355 1485,492
  rectangle net NetQ8_3: 1385,615 1495,778
  rectangle net OUTA: 1314,31.47 1375,117
  rectangle net OUTB: 1313,316.95 1375,400
  rectangle net OUTC: 1314,596.8 1375,680
Bottom Layer:
  rectangle net NetQ8_3: 1385,600 1495,780
  rectangle net NetQ5_3: 1385,325 1485,385
  rectangle net NetQ3_3: 1385,40 1485,135
  rectangle net NetQ2_4: 1314,190 1345,219
  rectangle net NetQ4_4: 1315,465 1375,494.59
  rectangle net NetQ6_4: 1315,745 1375,775
  region net GND: 1027.57,482.43 1077.06,432.94 1220,575.87 1170.5,625.37
  rectangle net NetQ8_3: 1385,630 1485,778
  rectangle net OUTC: 1314,579.59 1375,680
  rectangle net OUTB: 1313,304 1375,400
  rectangle net OUTA: 1314,32.46 1375,117
  rectangle net NetQ3_3: 1385,65 1485,209

## Silkscreen, mask and mechanical layers (free items; w line width, h text height)
Top Overlay:
  text "+" at 210,620 h200
  text "s" at 115,230 h100
  text "--" at 190,175 h200 r270